# Altium PCB Galileo_Control_Board.PcbDoc
Units mil, origin at the board's own origin, x right, y up, seen from the top; angles counter-clockwise.
Board outline 1834.65 x 1606.3 mil, 2 copper layers (Top Layer, Bottom Layer); 53 components, 57 nets, 204 pads, 33 vias.
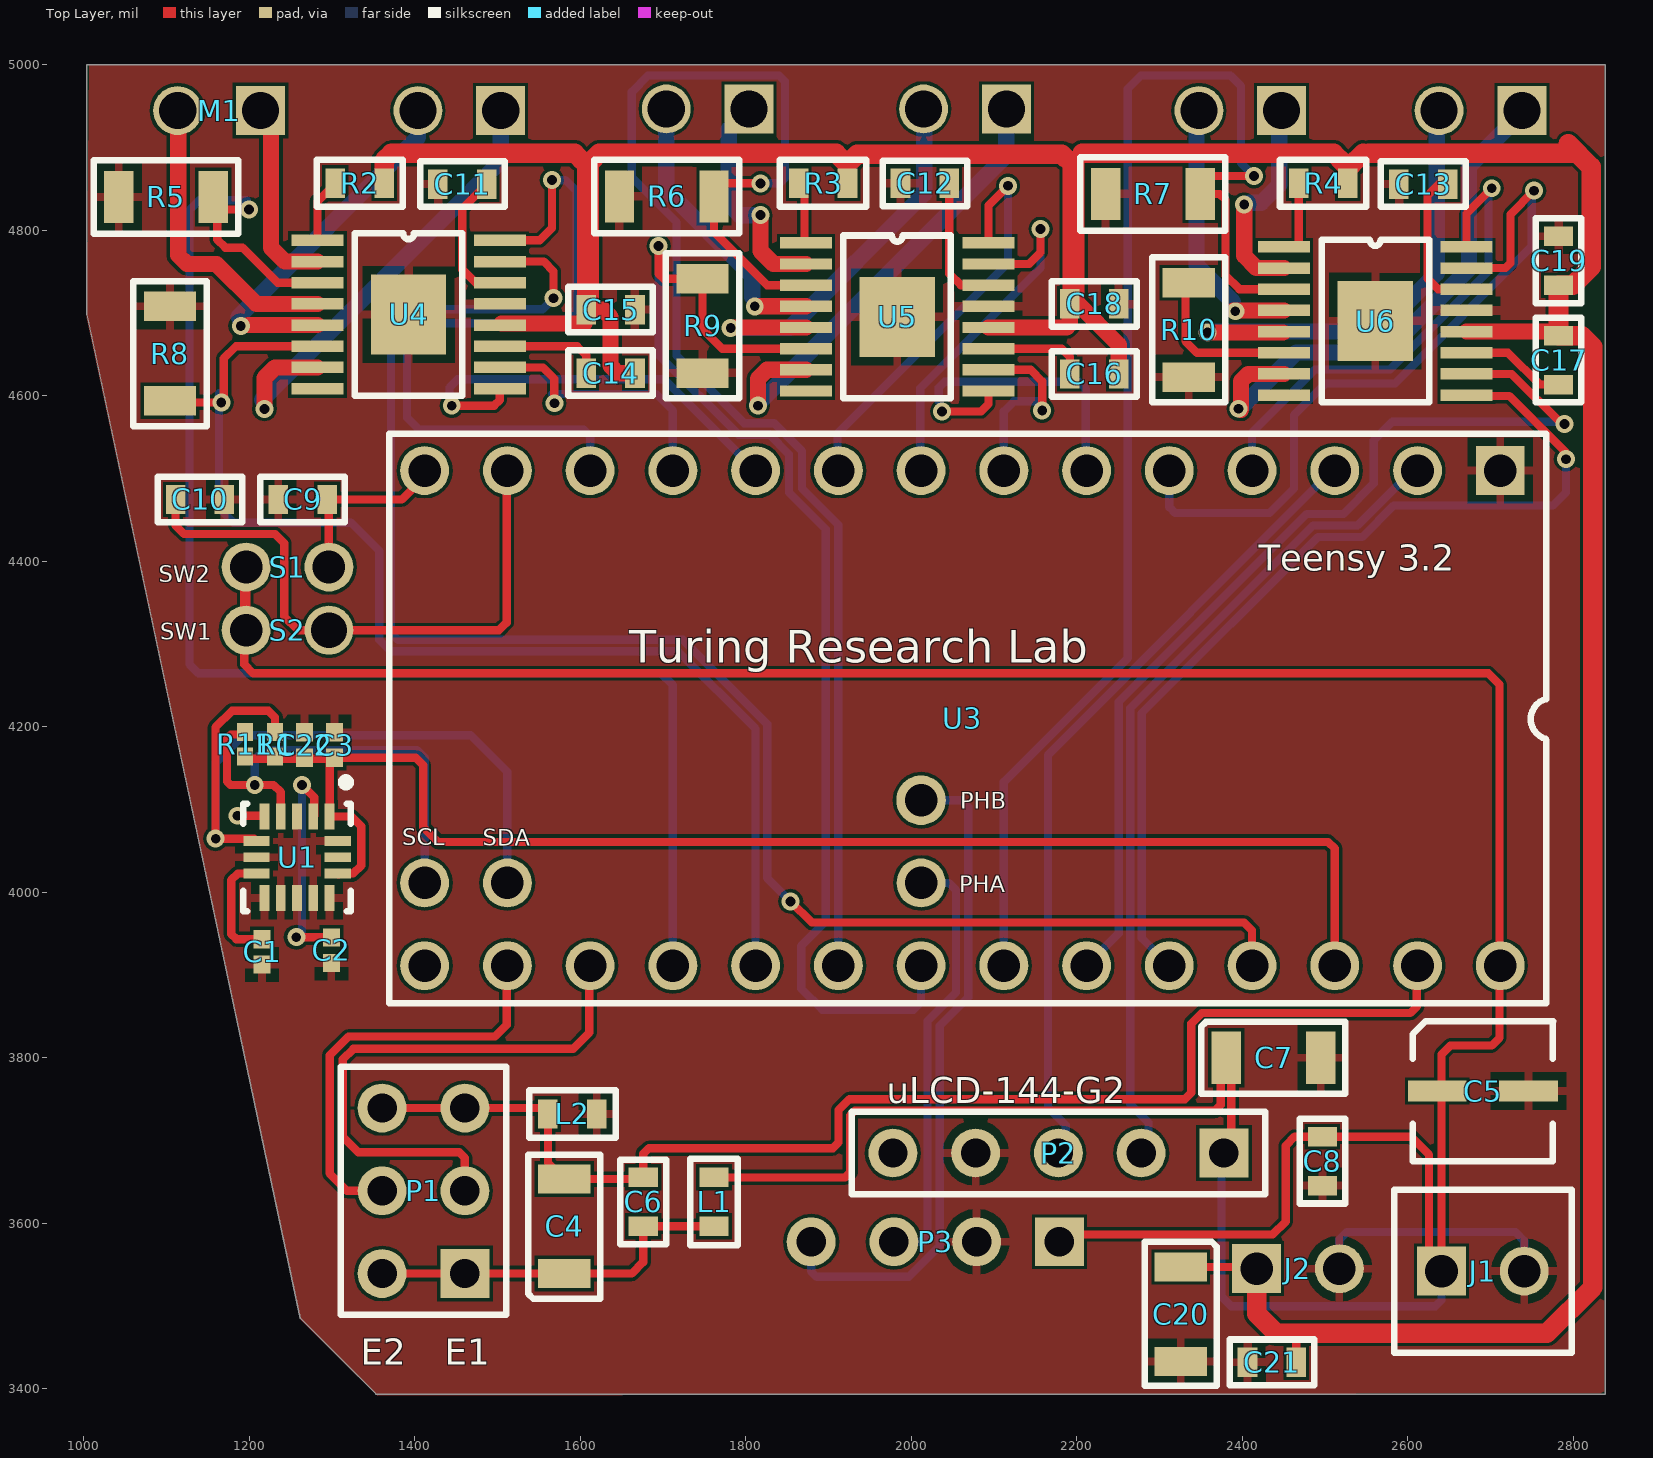
[diagram p0: Top Layer view]
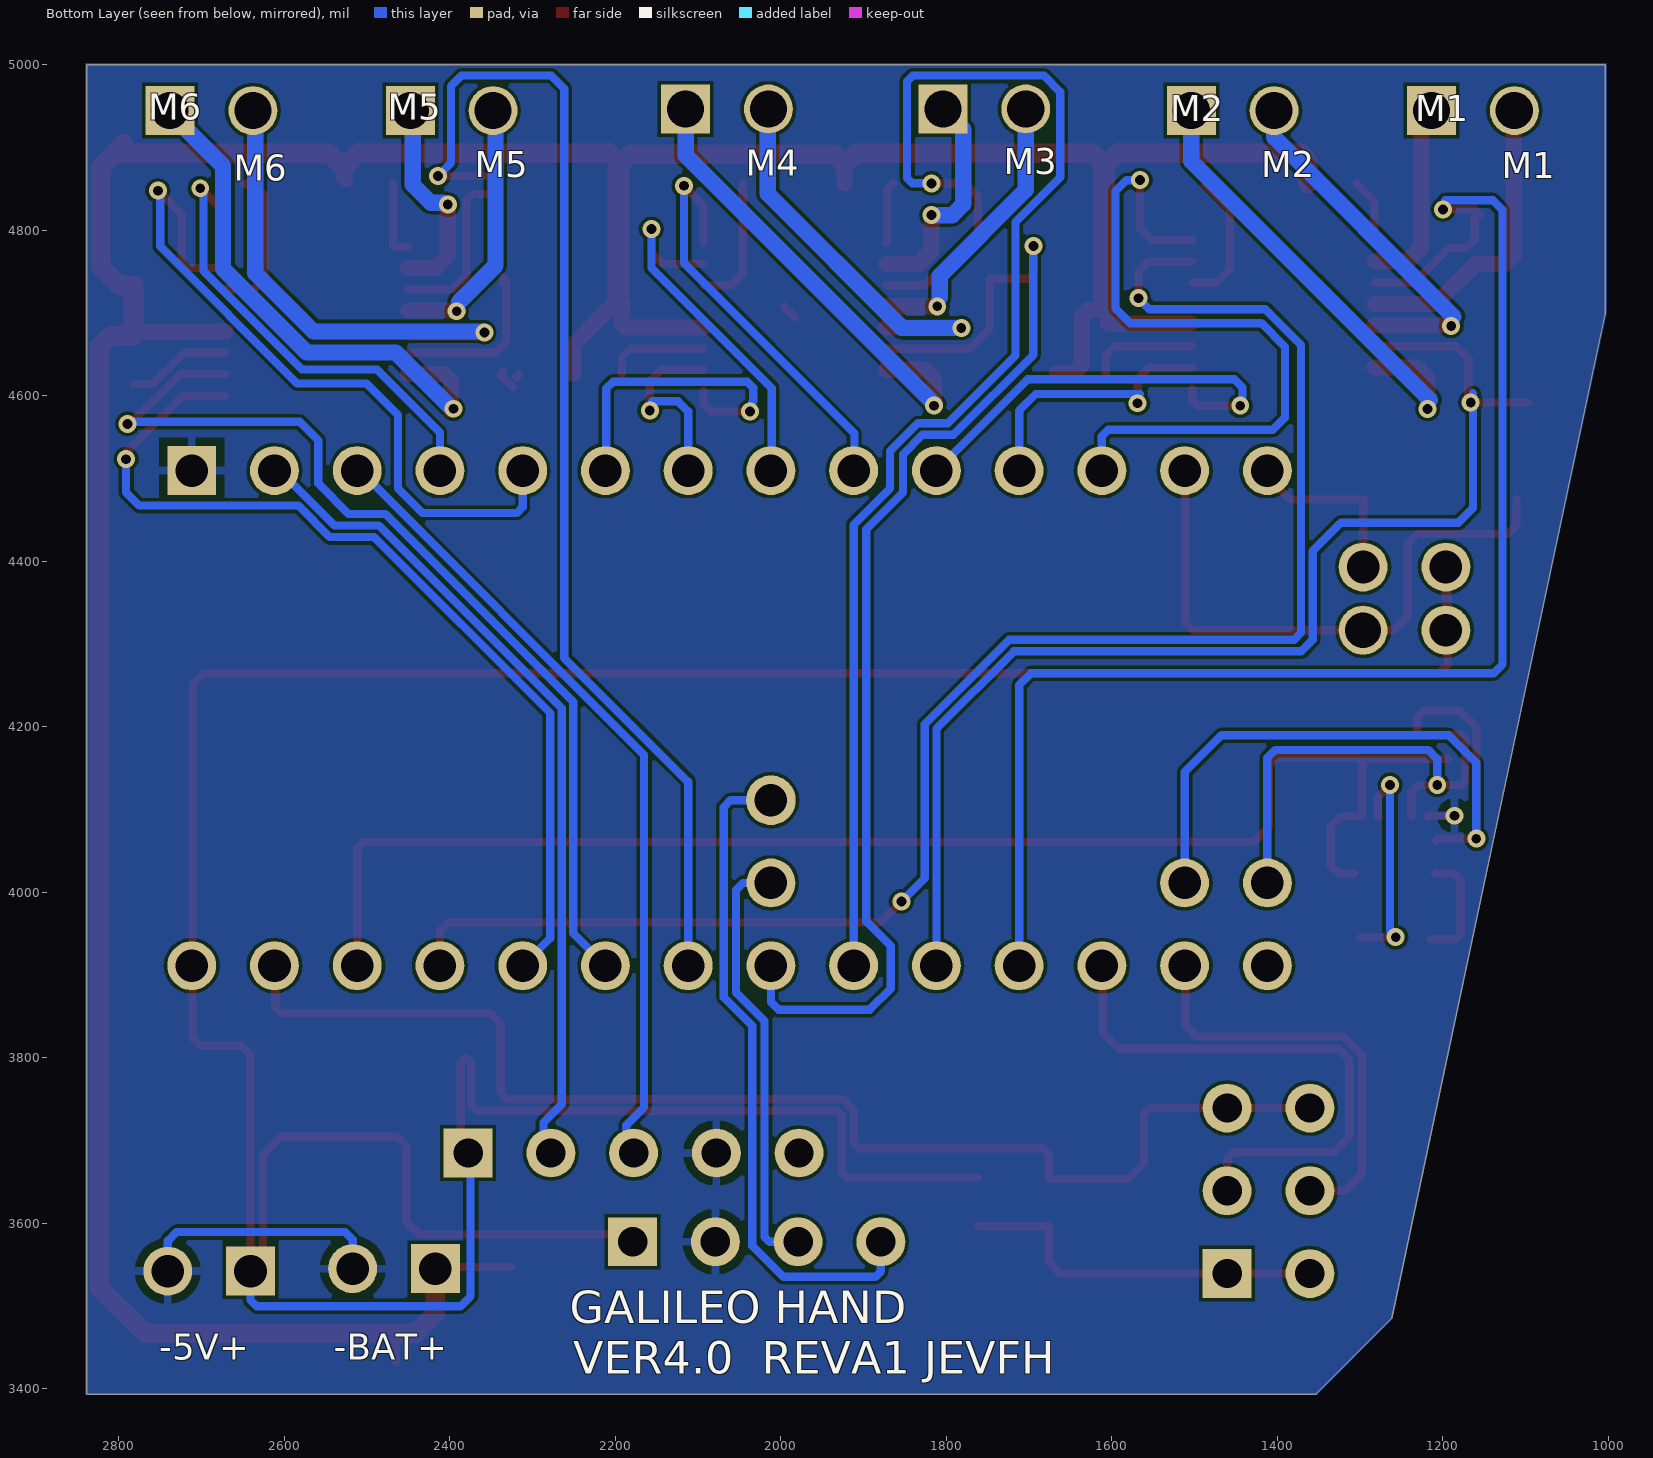
[diagram p1: Bottom Layer view, seen from below]

## Layer stack, top to bottom
Top Solder: solder mask 0.4, Solder Resist, Dk 3.5
Top Layer: signal copper 1.4
Dielectric 1: dielectric 12.6, FR-4, Dk 4.8
Bottom Layer: signal copper 1.4
Bottom Solder: solder mask 0.4, Solder Resist, Dk 3.5

## Board outline
1261.81,3485.04 1003.94,4698.43 1003.94,5000 2838.58,5000 2838.58,3393.7 1353.15,3393.7

## Design rules (kind name [scope] priority, off if disabled: settings)
Clearance [All] p1: gap=3.94 ignorepadtopadclearanceinfootprint=FALSE except(0: Arc-Hole Track-Hole SMDPad-Hole THPad-Hole Via-Hole Fill-Hole Poly-Hole Region-Hole Text-Hole)
ComponentClearance [All] p1: gap=7.87 collisioncheckmode=3 verticalgap=10 showdistances=FALSE
HoleSize [All] p1: absolutevalues=TRUE maxlimit=100 minlimit=0.79 maxpercent=80.000 minpercent=20.000
HoleToHoleClearance [All] p1: gap=3.94 allowstackedmicrovias=TRUE
MinimumSolderMaskSliver [All] p1: minsoldermaskwidth=3.94
MinimumSolderMaskSliver MinimumSolderMaskSliver_2 [All] p2: minsoldermaskwidth=3.94
MinimumSolderMaskSliver MinimumSolderMaskSliver_1 [All] p3: minsoldermaskwidth=1.97
PolygonConnect [All] p1: connectstyle=Relief reliefconductorwidth=10 reliefentries=4 polygonreliefangle="90 Angle" airgapwidth=10
RoutingVias [All] p1: holewidth=28 width=50 viastyle="Through Hole" minholewidth=28 minwidth=50 maxholewidth=28 maxwidth=50
SilkToSilkClearance [All] p1: silktosilkclearance=3.94
SilkToSolderMaskClearance [IsPad] p1: minsilkscreentomaskgap=3.94 clearancetoexposedcopper=TRUE
SolderMaskExpansion [All] p1: expansion=3.94
Width [All] p1: maxlimit=27.56 minlimit=10 preferedwidth=10
24 further rules are at their usual default settings.

## Components (designator, comment, footprint, x,y, rotation, side; value= is the part's Value field where it differs from the comment)
C1 "GRM155R71C104KA88J" CAPC1005X55X25LL05T10 1215.55,3928.15 r90 top
C2 "GRM155R71C104KA88J" CAPC1005X55X25LL05T10 1299.21,3930.12 r270 top
C3 "GRM155R60J475ME47D" CAPC1005X55X25LL05T10 1303.07,4178.15 r270 top
C4 "10uF, T" C1206 1580.71,3596.46 r90 top
C5 "10uF" CSVB 2690.94,3759.84 r0 top
C6 "100nF" C0603 1676.18,3625.98 r270 top
C7 "10uF, T" C1206 2437.99,3800.2 r0 top
C8 "100nF" C0603 2497.05,3675.2 r90 top
C9 "1uF" C0603 1264.57,4474.94 r0 top
C10 "1uF" C0603 1140.47,4474.94 r180 top
C11 "2.2uF" C0603 1457.6,4855.94 r180 top
C12 "2.2uF" C0603 2016.65,4856.93 r180 top
C13 "2.2uF" C0603 2619.02,4855.94 r180 top
C14 "10nF" C0603 1636.73,4627.6 r0 top
C15 "10uF" C0603 1636.73,4704.37 r180 top
C16 "10nF" C0603 2221.38,4626.61 r0 top
C17 "10nF" C0603 2782.4,4643.35 r90 top
C18 "10uF" C0603 2221.38,4711.26 r180 top
C19 "10uF" C0603 2782.4,4763.43 r270 top
C20 "10uF, T" C1206 2325.79,3490.16 r270 top
C21 "100nF" C0603 2436.02,3432.09 r0 top
C22 "GRM155R71C104KA88J" CAPC1005X55X25LL05T10 1266.65,4178.15 r270 top
J1 "TERMINAL BLOCK  2POS 3.5MM" 2POS3.5MM 2690.94,3542.32 r0 top
J2 "TERMINAL BLOCK  2POS 3.5MM" 2POS3.5MM 2467.52,3545.28 r0 top
L1 "EMI FILTER BED" R0603 1761.81,3625.98 r270 top
L2 "EMI FILTER BED" R0603 1590.55,3732.28 r180 top
M1 "Motor Pads" HDR1X2 1213.5,4944.88 r180 top
M2 "Motor Pads" HDR1X2 1503.86,4944.88 r180 bottom
M3 "Motor Pads" HDR1X2 1804.06,4946.85 r180 bottom
M4 "Motor Pads" HDR1X2 2115.08,4946.85 r180 bottom
M5 "Motor Pads" HDR1X2 2447.76,4944.88 r180 bottom
M6 "Motor Pads" HDR1X2 2738.11,4944.88 r180 bottom
P1 "Header 3X2" HDR2X3 1460.63,3539.37 r90 top
P2 "Header 5" HDR1X5 2377.95,3685.04 r180 top
P3 "Encoder" HDR1X4 2179.13,3577.76 r180 top
R1 "ERA-2AED472X" RESC1005X40X25LL10T10 1231.22,4179.13 r270 top
R2 "47k" R0603 1333.58,4856.93 r0 top
R3 "47k" R0603 1893.56,4856.93 r0 top
R4 "47k" R0603 2497.95,4856.93 r0 top
R5 "0.2" R1206 1099.41,4840.55 r0 top
R6 "0.2" R1206 1704.64,4841.18 r0 top
R7 "0.2" R1206 2292.24,4844.13 r0 top
R8 "0.2" R1206 1104.25,4651.22 r270 top
R9 "0.2" R1206 1747.95,4684.69 r90 top
R10 "0.2" R1206 2335.55,4679.76 r90 top
R11 "ERA-2AED472X" RESC1005X40X25LL10T10 1194.8,4179.13 r270 top
S1 "PB" SW#1 1246.26,4393.25 r180 top
S2 "PB" SW#2 1246.26,4316.93 r180 top
U1 "FXOS8700CQR1" FREE-QFN-16-3000X3000DE_V 1257.8,4042.48 r270 top
U3 "Teensy 3.2 - NXP Cortex-M4F" DIP28 2062.01,4210.63 r270 top
U4 "DRV8833CPWPR" SOP16 1392.64,4698.46 r0 top
U5 "DRV8833CPWPR" SOP16 1983.19,4695.51 r0 top
U6 "DRV8833CPWPR" SOP16 2560.95,4690.59 r0 top

## Footprints (in the part's own frame and the unit in brackets; to place one, negate y for a bottom-side part, rotate by r counter-clockwise, add the part's x,y. Pads: shape width x height; smd on the part's side, far side on the other; paste and mask are expansions set on the pad)
2POS3.5MM [mm]
  rect 1.5x1.5 hole 1: 1(-1.27,0)
  round 1.5 hole 1: 2(1.27,0)
  silkscreen extent -2.72,-2.5 2.72,2.5
C0603 [mm]
  rect 0.6x0.9 smd: 1(-0.75,0) 2(0.75,0)
  silkscreen extent -1.3,-0.7 1.3,0.7
C1206 [mm]
  rect 0.9x1.6 smd: 1(-1.45,0) 2(1.45,0)
  silkscreen extent -2.22,-1.1 2.2,1.1
CAPC1005X55X25LL05T10 [mm] "Chip Capacitor, 2-Leads, Body 1.00x0.50mm, IPC High Density"
  rect 0.56x0.52 smd: 1(-0.39,0) 2(0.39,0)
  body extent -0.53,-0.28 0.53,0.28, height 0.55
CSVB [mm]
  rect 1.8x0.65 smd: 1(-1.4,0) 2(1.4,0)
  silkscreen extent -2.15,-2.15 2.16,2.15
DIP28 [mm]
  rect 1.5x1.5 hole 1 mask+0.1: 1(-7.6,16.51)
  round 1.5 hole 1 mask+0.1: 2(-7.6,13.97) 3(-7.6,11.43) 4(-7.6,8.89) 5(-7.6,6.35) 6(-7.6,3.81) 7(-7.6,1.27) 8(-7.6,-1.27) 9(-7.6,-3.81) 10(-7.6,-6.35) 11(-7.6,-8.89) 12(-7.6,-11.43) 13(-7.6,-13.97) 14(-7.6,-16.51) 15(7.6,-16.51) 16(7.6,-13.97) 17(7.6,-11.43) 18(7.6,-8.89) 19(7.6,-6.35) 20(7.6,-3.81) 21(7.6,-1.27) 22(7.6,1.27) 23(7.6,3.81) 24(7.6,6.35) 25(7.6,8.89) 26(7.6,11.43) 27(7.6,13.97) 28(7.6,16.51)
  silkscreen extent -8.72,-17.6 8.75,17.93
FREE-QFN-16-3000X3000DE_V [mm] "QFN, 16-Leads, Body 3.00x3.00mm, Pitch 0.50mm"
  rect 0.8x0.3 smd: 1(-1.25,1) 2(-1.25,0.5) 3(-1.25,0) 4(-1.25,-0.5) 5(-1.25,-1) 9(1.25,-1) 10(1.25,-0.5) 11(1.25,0) 12(1.25,0.5) 13(1.25,1)
  rect 0.3x0.8 smd: 6(-0.5,-1.25) 7(0,-1.25) 8(0.5,-1.25) 14(0.5,1.25) 15(0,1.25) 16(-0.5,1.25)
  silkscreen extent -2.42,-1.65 1.65,1.65, body extent -1.5,-1.5 1.5,1.5, height 1.25
HDR1X2 [mm] "Connector; Header; 2 Position"
  rect 1.5x1.5 hole 1.143: 1(0,0)
  round 1.5 hole 1.143: 2(2.54,0)
HDR1X4 [mm] "Connector; Header; 4 Position"
  rect 1.5x1.5 hole 0.9: 1(0,0)
  round 1.5 hole 0.9: 2(2.54,0) 3(5.08,0) 4(7.62,0)
HDR1X5 [mm] "Connector; Header; 5 Position"
  rect 1.5x1.5 hole 0.9: 1(0,0)
  round 1.5 hole 0.9: 2(2.54,0) 3(5.08,0) 4(7.62,0) 5(10.16,0)
  silkscreen extent -1.27,-1.27 11.43,1.27
HDR2X3 [mm] "Connector; Header; 3x2 Position"
  rect 1.5x1.5 hole 0.9: 1(0,0)
  round 1.5 hole 0.9: 2(0,2.54) 3(2.54,0) 4(2.54,2.54) 5(5.08,0) 6(5.08,2.54)
  silkscreen extent -1.27,-1.27 6.35,3.81
R0603 [mm]
  rect 0.6x0.9 smd: 1(-0.75,0) 2(0.75,0)
  silkscreen extent -1.33,-0.72 1.33,0.72
R1206 [mm]
  rect 0.9x1.6 smd: 1(-1.45,0) 2(1.45,0)
  silkscreen extent -2.22,-1.12 2.22,1.12, body extent -1.6,-0.8 1.6,0.8, height 0.64
RESC1005X40X25LL10T10 [mm] "Chip Resistor, 2-Leads, Body 1.00x0.50mm, IPC High Density"
  rect 0.55x0.5 smd: 1(-0.375,0) 2(0.375,0)
  body extent -0.55,-0.3 0.55,0.3, height 0.4
SOP16 [mm]
  rect 1.6x0.35 smd mask+0.075: 1(-2.8,2.275) 2(-2.8,1.625) 3(-2.8,0.975) 4(-2.8,0.325) 5(-2.8,-0.325) 6(-2.8,-0.975) 7(-2.8,-1.625) 8(-2.8,-2.275) 9(2.8,-2.275) 10(2.8,-1.625) 11(2.8,-0.975) 12(2.8,-0.325) 13(2.8,0.325) 14(2.8,0.975) 15(2.8,1.625) 16(2.8,2.275)
  rect 2.31x2.46 smd: 17(0,0)
  silkscreen extent -1.65,-2.5 1.65,2.5
SW#1 [mm]
  round 1.5 hole 1: 1(-1.27,0) 2(1.27,0)
SW#2 [mm]
  round 1.5 hole 1.1: 1(-1.27,0)
  round 1.5 hole 1: 2(1.27,0)

## Part data
C1 C2 C22: library part CMP-2008-03928-1, Manufacturer=Murata, Part Number=GRM155R71C104KA88J
C3: library part CMP-2008-04549-1, Manufacturer=Murata, Part Number=GRM155R60J475ME47D
C4 C7 C20: library part T491C106K020AT, "CAP TANT 10UF 20V 10% 2413", Capacitance=10µF, ESR (Equivalent Series Resistance)="1.8 Ohm", Lifetime @ Temp.="2000 Hrs @ 85°C", Manufacturer=Kemet, Manufacturer Part Number=TCJA106M025R0150, Manufacturer Size Code=C, Operating Temperature="-55°C ~ 125°C", Package / Case="2413 (6032 Metric)", Tolerance=±10%, Voltage - Rated=20V, Category=Capacitors, ComponentLink1Description=http://www.kemet.com/Lists/ProductCatalog/Attachments/254/KEM_T2005_T491.pdf, ComponentLink1URL=http://www.kemet.com/Lists/ProductCatalog/Attachments/254/KEM_T2005_T491.pdf, Features="General Purpose", Height - Seated (Max)="0.110\" (2.80mm)", Lead Spacing=-, Mounting Type="Surface Mount", Packaging="Cut Tape (CT)", Pricing 1="1=0.73, 10=0.7, 50=0.418, 100=0.3396, 250=0.28216, 500=0.25602, 1000=0.23513 (USD)", Pricing 2="1=0.66, 10=0.487, 100=0.3342, 500=0.2645, 1000=0.2228 (USD)", RoHS="RoHS Compliant", Size / Dimension="0.236\" L x 0.126\" W (6.00mm x 3.20mm)", Stock 1=94667, Stock 2=1927, Supplier 1=Digi-Key, Supplier 2=Digi-Key, Supplier Part Number 2=478-10001-6-ND, TYPE=Molded
C5: library part EEE-1EA100WR, "CAP ALUM 10UF 20% 25V SMD", Capacitance=10µF, ESR (Equivalent Series Resistance)=-, Lifetime @ Temp.="1000 Hrs @ 85°C", Manufacturer="Panasonic Electronic Components", Operating Temperature="-40°C ~ 85°C", Package / Case="Radial, Can - SMD", Ripple Current=22mA, Supplier Part Number 1=PCE3895CT-ND, Tolerance=±20%, Voltage Rating=25V, Applications=Automotive, Category=Capacitors, ComponentLink1Description=http://media.digikey.com/pdf/Data%20Sheets/Panasonic%20Capacitors%20PDFs/EEE_S_A.pdf, ComponentLink1URL=http://media.digikey.com/pdf/Data%20Sheets/Panasonic%20Capacitors%20PDFs/EEE_S_A.pdf, Height - Seated (Max)="0.213\" (5.40mm)", Impedance=-, Lead Spacing=-, Manufacturer Part Number=EEE-1EA100WR, Mounting Type="Surface Mount", Packaging="Cut Tape (CT)", Pricing 1="1=0.41, 10=0.319, 25=0.2612, 50=0.2102, 100=0.1668, 250=0.12324, 500=0.0957, 1000=0.0754 (USD)", RoHS="RoHS Compliant", Size / Dimension="0.157\" Dia (4.00mm)", Stock 1=144383, Supplier 1=Digi-Key, Surface Mount Land Size="0.169\" L x 0.169\" W (4.30mm x 4.30mm)", TYPE=IC
C6 C8 C21: library part GRM188R71E104KA01D, "CAP CER 0.1UF 25V X7R 0603", Capacitance=0.1µF, Manufacturer="Murata Electronics North America", Operating Temperature="-55°C ~ 125°C", Package / Case="0603 (1608 Metric)", Ratings=-, Supplier Part Number 1=490-1524-1-ND, Temperature Coefficient=X7R, Tolerance=±10%, Voltage - Rated=25V, Applications="General Purpose", Category=Capacitors, ComponentLink1Description=http://www.murata.com/~/media/webrenewal/support/library/catalog/products/capacitor/mlcc/c02e.pdf, ComponentLink1URL=http://www.murata.com/~/media/webrenewal/support/library/catalog/products/capacitor/mlcc/c02e.pdf, Features=-, Height - Seated (Max)=-, Lead Spacing=-, Lead Style=-, Manufacturer Part Number=GRM188R71E104KA01D, Mounting Type="Surface Mount, MLCC", Packaging="Cut Tape (CT)", Pricing 1="1=0.1, 10=0.019, 50=0.0104, 100=0.0088, 250=0.0072, 500=0.00616, 1000=0.0048 (USD)", RoHS="RoHS Compliant", Size / Dimension="0.063\" L x 0.031\" W (1.60mm x 0.80mm)", Stock 1=5973420, Supplier 1=Digi-Key, Thickness (Max)="0.035\" (0.90mm)"
C9 C10: library part GRM188R61E105KA12D, "CAP CER 1UF 25V X5R 0603", Capacitance=1µF, Manufacturer="Murata Electronics North America", Operating Temperature="-55°C ~ 85°C", Package / Case="0603 (1608 Metric)", Ratings=-, Supplier Part Number 1=490-3897-1-ND, Temperature Coefficient=X5R, Tolerance=±10%, Voltage - Rated=25V, Applications="General Purpose", Category=Capacitors, ComponentLink1Description=http://www.murata.com/~/media/webrenewal/support/library/catalog/products/capacitor/mlcc/c02e.pdf, ComponentLink1URL=http://www.murata.com/~/media/webrenewal/support/library/catalog/products/capacitor/mlcc/c02e.pdf, Features=-, Height - Seated (Max)=-, Lead Spacing=-, Lead Style=-, Manufacturer Part Number=GRM188R61E105KA12D, Mounting Type="Surface Mount, MLCC", Packaging="Cut Tape (CT)", Pricing 1="1=0.1, 10=0.044, 50=0.0238, 100=0.0202, 250=0.01652, 500=0.01412, 1000=0.01101 (USD)", RoHS="RoHS Compliant", Size / Dimension="0.063\" L x 0.031\" W (1.60mm x 0.80mm)", Stock 1=1934941, Supplier 1=Digi-Key, Thickness (Max)="0.035\" (0.90mm)"
C11 C12 C13: library part 06036D225KAT2A, "CAP CER 2.2UF 6.3V X5R 0603", Capacitance=2.2µF, Manufacturer="AVX Corporation", Operating Temperature="-55°C ~ 85°C", Package / Case="0603 (1608 Metric)", Ratings=-, Supplier Part Number 1=478-1252-1-ND, Temperature Coefficient=X5R, Tolerance=±10%, Voltage - Rated=6.3V, Applications="General Purpose", Category=Capacitors, ComponentLink1Description=http://datasheets.avx.com/cx5r.pdf, ComponentLink1URL=http://datasheets.avx.com/cx5r.pdf, Features=-, Height - Seated (Max)=-, Lead Spacing=-, Lead Style=-, Manufacturer Part Number=06036D225KAT2A, Mounting Type="Surface Mount, MLCC", Packaging="Cut Tape (CT)", Pricing 1="1=0.27, 10=0.224, 100=0.112, 250=0.084, 500=0.0742, 1000=0.0658 (USD)", RoHS="RoHS Compliant", Size / Dimension="0.063\" L x 0.032\" W (1.60mm x 0.81mm)", Stock 1=9901, Supplier 1=Digi-Key, Thickness (Max)="0.035\" (0.90mm)"
C14 C16 C17: library part C0603C103K4RACTU, "CAP CER 10000PF 16V X7R 0603", Capacitance=10000pF, Manufacturer=Kemet, Operating Temperature="-55°C ~ 125°C", Package / Case="0603 (1608 Metric)", Ratings=-, Supplier Part Number 1=399-7841-1-ND, Temperature Coefficient=X7R, Tolerance=±10%, Voltage - Rated=16V, Applications="General Purpose", Category=Capacitors, ComponentLink1Description=http://www.kemet.com/docfinder?Partnumber=C0603C103K4RACTU, ComponentLink1URL=http://www.kemet.com/docfinder?Partnumber=C0603C103K4RACTU, Features=-, Height - Seated (Max)=-, Lead Spacing=-, Lead Style=-, Manufacturer Part Number=C0603C103K4RACTU, Mounting Type="Surface Mount, MLCC", Packaging="Cut Tape (CT)", Pricing 1="1=0.25, 10=0.173, 50=0.105, 100=0.0882, 250=0.0714, 500=0.063, 1000=0.05355 (USD)", RoHS="RoHS Compliant", Size / Dimension="0.063\" L x 0.031\" W (1.60mm x 0.80mm)", Stock 1=179935, Supplier 1=Digi-Key, Thickness (Max)="0.034\" (0.87mm)"
C15 C18 C19: library part GRT188R61E106ME13D, "CAP CER 10UF 25V X5R 0603", Capacitance=10µF, Manufacturer="Murata Electronics North America", Operating Temperature="-55°C ~ 85°C", Package / Case="0603 (1608 Metric)", Ratings=AEC-Q200, Supplier Part Number 1=490-12323-1-ND, Temperature Coefficient=X5R, Tolerance=±20%, Voltage - Rated=25V, Applications=Automotive, Category=Capacitors, ComponentLink1Description=http://search.murata.co.jp/Ceramy/image/img/A01X/G101/ENG/GRT188R61E106ME13-01.pdf, ComponentLink1URL=http://search.murata.co.jp/Ceramy/image/img/A01X/G101/ENG/GRT188R61E106ME13-01.pdf, Features=-, Height - Seated (Max)=-, Lead Spacing=-, Lead Style=-, Manufacturer Part Number=GRT188R61E106ME13D, Mounting Type="Surface Mount, MLCC", Packaging="Cut Tape (CT)", Pricing 1="1=0.48, 10=0.424, 50=0.2576, 100=0.2121, 250=0.16968, 500=0.15454, 1000=0.13938 (USD)", RoHS="RoHS Compliant", Size / Dimension="0.063\" L x 0.031\" W (1.60mm x 0.80mm)", Stock 1=62, Supplier 1=Digi-Key, Thickness (Max)="0.035\" (0.90mm)"
J1 J2: library part 0393570002, "CONN TERMINAL BLOCK 2POS 3.5MM", Color=Black, Current=12A, Manufacturer="Molex, LLC", Operating Temperature="-40°C ~ 105°C", Supplier Part Number 1=WM7877-ND, Voltage=300V, Category="Connectors, Interconnects", Clamp Material - Plating="Copper Alloy - Nickel Plated", ComponentLink1Description=http://www.molex.com/pdm_docs/sd/393570002_sd.pdf, ComponentLink1URL=http://www.molex.com/pdm_docs/sd/393570002_sd.pdf, Contact Material - Plating="Copper Alloy - Tin Plated", Features=-, Housing Material="Polyamide (PA), Nylon", Manufacturer Part Number=0393570002, Mating Orientation="Horizontal with Board", Mounting Type="Through Hole", Number of Levels=1, Packaging=Bulk, Pitch="0.138\" (3.50mm)", Positions Per Level=2, Pricing 1="1=1.1, 10=0.686, 50=0.528, 100=0.517, 250=0.44, 500=0.418, 1000=0.374, 2500=0.297, 5000=0.2926 (USD)", RoHS="RoHS Compliant", Screw Material - Plating="Copper Alloy - Nickel Plated", Screw Thread=M3, Stock 1=1266, Supplier 1=Digi-Key, Torque - Screw="0.31 Nm (2.7 Lb-In)", Wire Gauge="16-28 AWG", Wire Termination="Screw - Rising Cage Clamp"
L1 L2: library part BLM18PG471SN1D, "FERRITE BEAD 470 OHM 0603", Current Rating (Max)=1A, DC Resistance (DCR) (Max)="200 mOhm", Impedance @ Frequency="470 Ohm @ 100MHz", Manufacturer="Murata Electronics North America", Operating Temperature="-55°C ~ 125°C", Package / Case="0603 (1608 Metric)", Ratings=-, Supplier Part Number 1=490-5223-1-ND, Category=Filters, ComponentLink1Description=http://search.murata.co.jp/Ceramy/image/img/PDF/ENG/L0110S0100BLM18P.pdf, ComponentLink1URL=http://search.murata.co.jp/Ceramy/image/img/PDF/ENG/L0110S0100BLM18P.pdf, Filter Type="Power Line", Height (Max)="0.037\" (0.95mm)", Manufacturer Part Number=BLM18PG471SN1D, Mounting Type="Surface Mount", Number of Lines=1, Packaging="Cut Tape (CT)", Pricing 1="1=0.1, 10=0.083, 50=0.0684, 100=0.0501, 250=0.03644, 500=0.0334, 1000=0.02884 (USD)", RoHS="RoHS Compliant", Size / Dimension="0.063\" L x 0.031\" W (1.60mm x 0.80mm)", Stock 1=101023, Supplier 1=Digi-Key
M1 M2 M3 M4 M5 M6: library part "Header 2", "Header, 2-Pin", LatestRevisionDate=17-Jul-2002, LatestRevisionNote="Re-released for DXP Platform.", Publisher="Altium Limited"
P1: "Header, 3-Pin, Dual row", LatestRevisionDate=17-Jul-2002, LatestRevisionNote="Re-released for DXP Platform.", Publisher="Altium Limited"
P2: "Header, 5-Pin", LatestRevisionDate=17-Jul-2002, LatestRevisionNote="Re-released for DXP Platform.", Publisher="Altium Limited"
P3: library part "Header 4", "Header, 4-Pin", LatestRevisionDate=17-Jul-2002, LatestRevisionNote="Re-released for DXP Platform.", Publisher="Altium Limited"
R1 R11: library part CMP-2002-05861-1, Manufacturer=Panasonic, Part Number=ERA-2AED472X
R2 R3 R4: library part ERJ-3EKF4702V, "RES SMD 47K OHM 1% 1/10W 0603", Manufacturer="Panasonic Electronic Components", Operating Temperature="-55°C ~ 155°C", Package / Case="0603 (1608 Metric)", Power (Watts)="0.1W, 1/10W", Supplier Device Package=0603, Supplier Part Number 1=P47.0KHCT-ND, Temperature Coefficient=±100ppm/°C, Tolerance=±1%, Category=Resistors, ComponentLink1Description=http://industrial.panasonic.com/www-cgi/jvcr13pz.cgi?E+PZ+3+AOA0002+ERJ3EKF4702V+7+WW, ComponentLink1URL=http://industrial.panasonic.com/www-cgi/jvcr13pz.cgi?E+PZ+3+AOA0002+ERJ3EKF4702V+7+WW, Composition="Thick Film", Features="Automotive AEC-Q200", Height="0.022\" (0.55mm)", Manufacturer Part Number=ERJ-3EKF4702V, Number of Terminations=2, Packaging="Cut Tape (CT)", Pricing 1="1=0.1, 50=0.0114, 100=0.0084, 250=0.00644, 500=0.00514, 1000=0.00379 (USD)", Resistance (Ohms)=47k, RoHS="RoHS Compliant", Size / Dimension="0.063\" L x 0.031\" W (1.60mm x 0.80mm)", Stock 1=3738786, Supplier 1=Digi-Key
R5 R6 R7 R8 R9 R10: library part ERJ-8BSJR20V, "RES SMD 0.2 OHM 5% 1/2W 1206", Manufacturer="Panasonic Electronic Components", Operating Temperature="-55°C ~ 125°C", Package / Case="1206 (3216 Metric)", Power (Watts)="0.5W, 1/2W", Supplier Device Package=1206, Supplier Part Number 1=P17692CT-ND, Temperature Coefficient=±250ppm/°C, Tolerance=±5%, Category=Resistors, ComponentLink1Description=https://industrial.panasonic.com/cdbs/www-data/pdf/RDA0000/AOA0000C239.pdf, ComponentLink1URL=https://industrial.panasonic.com/cdbs/www-data/pdf/RDA0000/AOA0000C239.pdf, Composition="Thick Film", Features="Automotive AEC-Q200, Current Sense", Height="0.028\" (0.70mm)", Manufacturer Part Number=ERJ-8BSJR20V, Number of Terminations=2, Packaging="Cut Tape (CT)", Pricing 1="1=0.43, 50=0.1858, 100=0.1381, 250=0.11668, 500=0.10002, 1000=0.07621 (USD)", Resistance (Ohms)=0.2, RoHS="RoHS Compliant", Size / Dimension="0.126\" L x 0.063\" W (3.20mm x 1.60mm)", Stock 1=4865, Supplier 1=Digi-Key
S1 S2: library part "D6C90 F1 LFS", "SWITCH PUSH SPST-NO 0.1A 32V", Color - Actuator/Cap=Black, Current Rating="100mA (DC)", Illumination Type, Color=-, Manufacturer="C&K Components", Operating Temperature="-20°C ~ 85°C", Supplier Part Number 1=401-1969-ND, Voltage Rating - DC=32V, Actuator Type="Square, Button", Category=Switches, Circuit=SPST-NO, ComponentLink1Description=http://www.ck-components.com/index.php?module=media&action=Display&cmpref=13327&lang=en&width=&height=&format=&alt=, ComponentLink1URL=http://www.ck-components.com/index.php?module=media&action=Display&cmpref=13327&lang=en&width=&height=&format=&alt=, Electrical Life="250,000 Cycles", Features="Tactile Feedback", Illumination Voltage (Nominal)=-, Ingress Protection=-, Manufacturer Part Number="D6C90 F1 LFS", Mechanical Life=-, Mounting Type="Through Hole", Packaging=Bulk, Panel Cutout Dimensions=-, Pricing 1="1=0.82, 10=0.767, 25=0.73, 50=0.6936, 100=0.6753, 250=0.657, 500=0.6205, 1000=0.584, 2500=0.52925 (USD)", RoHS="RoHS Compliant", Stock 1=9241, Supplier 1=Digi-Key, Switch Function=Off-Mom, Termination Style="PC Pin", TYPE=IC, Voltage Rating - AC=-
U1: library part CMP-2000-05129-1, "6-Axis Xtrinsic Sensor with Integrated Linear Accelerometer and Magnetometer, 1.95 to 3.6 V, -40 to 85 degC, 16-Pin QFN, RoHS, Tape and Reel", Manufacturer=Freescale, Maximum Operating Temperature=+85C, Minimum Operating Temperature=-40C, Operating Supply Voltage=1.95Vto3.6V, Package / Case=QFN-16, Package Description="16-Pin Quad Flat No-lead Package, Body 3 x 3 mm, Pitch 0.5 mm", Supply Voltage - Max=3.6V, Supply Voltage - Min=1.95V, Brand=FreescaleSemiconductor, Datasheet URL=https://datasheet.ciiva.com/12175/fxos8700cq-60595-12175213.pdf, Datasheet Version="Rev. 1, 06/2012", Factory Pack Quantity=1000, Manufacturer URL=http://www.nxp.com/, Mounting Style=SMD/SMT, Output Type=Digital, Package Reference=QFN-16, Packaging=Reel, Product Category=BoardMountAccelerationSensors, RoHS=Details, Sensing Axis=X,Y,Z, Tradename=Xtrinsic, TYPE=6AxisSensor, Unit Weight=0.000808oz
U3: library part Teensy, Manufacturer="SparkFun Electronics", Manufacturer Part Number=DEV-13305, Operating System=-, Supplier Part Number 1=1568-1233-ND, Board Type="Evaluation Platform", Category="Programmers, Development Systems", ComponentLink1Description=http://media.digikey.com/pdf/Data%20Sheets/Sparkfun%20PDFs/DEV-13305_Web.pdf, ComponentLink1URL=http://media.digikey.com/pdf/Data%20Sheets/Sparkfun%20PDFs/DEV-13305_Web.pdf, ComponentLink2Description=http://media.digikey.com/pdf/Data%20Sheets/Sparkfun%20PDFs/DEV-13736_Web.pdf, ComponentLink2URL=http://media.digikey.com/pdf/Data%20Sheets/Sparkfun%20PDFs/DEV-13736_Web.pdf, Contents=Board(s), Core Processor="ARM® Cortex®-M0+", For Use With/Related Products=KL2x, Mounting Type=Fixed, Platform=Teensy-LC, Pricing 1="1=14.38 (USD)", Pricing 2="1=22.5 (USD)", RoHS="RoHS Compliant", Stock 1=0, Stock 2=961, Supplier 1=Digi-Key, Supplier 2=Digi-Key, Supplier Part Number 2=1568-1231-ND, TYPE=IC
U4 U5 U6: "IC MOTOR DRIVER PAR", Current - Output / Channel=700mA, Current - Peak Output=1A, Manufacturer="Texas Instruments", Operating Temperature="-40°C ~ 150°C (TJ)", Package / Case="16-TSSOP (0.173\", 4.40mm Width) Exposed Pad", Supplier Device Package=16-HTSSOP, Supplier Part Number 1=296-40078-1-ND, Voltage - Load="2.7 V ~ 10.8 V", Applications="DC Motors, General Purpose, Solenoids, Stepper Motors", Category="Integrated Circuits (ICs)", ComponentLink1Description=http://www.ti.com/lit/ds/symlink/drv8833c.pdf, ComponentLink1URL=http://www.ti.com/lit/ds/symlink/drv8833c.pdf, Fault Protection="Current Limiting, Over Temperature, Short Circuit, UVLO", Features="Status Flag", Interface=PWM, Load Type=Inductive, Manufacturer Part Number=DRV8833CPWPR, Mounting Type="Surface Mount", Output Configuration="Half Bridge (4)", Packaging="Cut Tape (CT)", Pricing 1="1=2.05, 10=1.843, 100=1.4783, 500=1.215, 1000=0.84375 (USD)", Rds On (Typ)="550 mOhm LS, 1.18 Ohm HS", RoHS="RoHS Compliant", Stock 1=779, Supplier 1=Digi-Key, Technology="Power MOSFET", Voltage - Supply="2.7 V ~ 10.8 V"

## Free pads (board coordinates)
  round 60 hole 39.37: 3(2012.01,4111.42)
  round 59.06 hole 39.37: ""(1412.01,4011.42) ""(1512.01,4011.42) ""(2012.01,4011.42)

## Via types
v1: diameter 21.65, hole 11.81, Top Layer to Bottom Layer, 33 vias

## Nets (pads, with @x,y where several pads share a name; then routed paths per layer and width w, separated by ;. In a path a pad name is that pad's centre, name@x,y a point inside that pad or via, vN(x,y) a via of type N, cw(c..) or ccw(c..) an arc to the next point about the centre after c; other vN are vias at no path point)
3V3: C3.2 C22.2 R1.2 R11.2 U1.1 U1.14 U3.26 | length 1745.7
  Top Layer w10: R11.2@1193.82,4161.42 C3.2@1301.69,4161.42 ; U1.14@1307.99,4021.81 U1.14 1325.71,4022.8 1335.55,4032.64 1335.55,4079.88 1323.74,4091.69 U1.1 1297.17,4156.89 C3.2@1301.69,4161.42 ; U3.26 2512.01,4052.95 2503.94,4061.02 1428.15,4061.02 1410.43,4078.74 1410.43,4153.54 1401.18,4162.8 C3.2 C3.2@1301.69,4161.42
+5V/ANA: C4.1 C6.2 L1.2 P1.1 P1.2 | length 450.2
  Top Layer w10: P1.2 P1.1 C4.1 1662.4,3539.37 1676.18,3553.15 C6.2 L1.2
+5V/DIG: C5.1 C7.1 C8.2 J1.1 L1.1 P2.1 P3.1 S1.2 S2.2 U3.28 | length 4570.7
  Top Layer w10: S1.2@1194.1,4398.62 1194.1,4275.39 1204.72,4264.76 2697.83,4264.76 2711.09,4251.51 U3.28@2711.09,3911.42 ; S2.2 S1.2 ; L1.1 1920.28,3655.51 1926.18,3661.42 1926.18,3730.32 1932.09,3736.22 2367.13,3736.22 2374.02,3743.11 2374.02,3793.31 C7.1 2386.81,3794.29 P2.1@2386.81,3676.18 ; P3.1@2187.01,3591.54 2187.01,3576.77 2196.85,3586.61 2437.01,3586.61 2452.76,3602.36 2452.76,3693.9 2463.58,3704.72 C8.2 2604.33,3704.72 2625.98,3683.07 2625.98,3557.28 J1.1 2640.94,3804.33 2651.57,3814.96 2701.77,3814.96 2711.02,3824.21 U3.28@2711.02,3918.31
  Bottom Layer w10: P2.1@2386.81,3676.18 2375,3664.37 2375,3511.81 2386.81,3500 2633.86,3500 2640.94,3507.09 J1.1
+VBAT: C14.2 C15.2 C16.2 C17.2 C18.2 C19.2 C20.1 C21.2 J2.1 R2.2 R3.2 R4.2 U4.12 U5.12 U6.12 | length 4956.5
  Top Layer w10: U4.12 U4.12@1504.84,4687.64 ; 1601.3,4885.47 1601.3,4691.57 1605.24,4687.64 1607.2,4689.6 C15.2 C15.2@1613.11,4710.28 ; C18.2@2187.91,4715.2 2187.91,4886.46 ; C18.2@2199.72,4719.13 C18.2 C18.2@2201.69,4711.26 ; C20.1 J2.1@2415.55,3547.24 ; 2463.58,3467.27 2465.55,3465.3 C21.2 ; R4.2@2522.56,4856.93 2522.56,4881.53 ; R4.2@2527.48,4862.84 R4.2 2532.4,4861.85 2532.4,4879.57 ; C17.2@2782.4,4666.97 C17.2
  Top Layer w19.68: U4.12@1504.84,4687.64 C15.2@1605.24,4687.64 ; C15.2 1627.87,4704.37 1636.73,4695.51 1636.73,4636.46 1645.59,4627.6 C14.2 ; C15.2@1613.11,4710.28 1613.11,4883.5 ; 1923.09,4879.63 R3.2 1923.09,4880.49 ; U5.12 2187.91,4682.72 2191.85,4686.65 C18.2 ; C18.2@2199.72,4719.13 2199.72,4886.46 2206.61,4893.35 ; C18.2@2201.69,4711.26 2250.9,4662.05 C16.2 ; U6.12 C17.2@2777.48,4677.79
  Top Layer w23.62: R2.2 1363.11,4884.49 1371.97,4893.35 1593.43,4893.35 1601.3,4885.47 ; 1613.11,4883.5 1622.95,4893.35 1909.37,4893.35 1923.09,4879.63 ; 1923.09,4880.49 1934.96,4892.36 2182.01,4892.36 2187.91,4886.46 ; 2206.61,4893.35 2510.75,4893.35 2522.56,4881.53 ; J2.1 2417.52,3490.94 2441.2,3467.27 2463.58,3467.27 2768.45,3467.27 2823.82,3522.64 2823.82,4659.45 2810.39,4672.87 C17.2 ; 2532.4,4879.57 2546.18,4893.35 ; 2553.07,4893.35 2797.17,4893.35 ; C17.2@2782.4,4677.79 C19.2 2799.84,4733.9 2821.85,4755.9 2821.85,4876.97 2794.29,4904.53
AGND: C4.2 C6.1 L2.2 P1.5 P1.6 U3.27 | length 1552
  Top Layer w10: P1.6 P1.5 1553.94,3739.37 L2.2 1561.03,3673.23 C4.2 1674.21,3653.54 C6.1 1676.18,3684.05 1683.07,3690.94 1905.51,3690.94 1912.24,3697.68 1912.24,3737.05 1925.36,3750.16 2330.87,3750.16 2338.58,3757.87 2338.58,3841.54 2351.38,3854.33 2603.35,3854.33 2611.09,3862.07 U3.27@2611.09,3918.31
E1: P1.3 U3.17 | length 690.7
  Top Layer w10: P1.3 1460.63,3679.13 1453.74,3686.02 1331.69,3686.02 1312.99,3704.72 1312.99,3798.23 1325.78,3811.02 1591.54,3811.02 1611.09,3830.57 U3.17@1611.09,3918.31
E2: P1.4 U3.16 | length 522.3
  Top Layer w10: P1.4 1318.31,3639.37 1297.24,3660.43 1297.24,3803.15 1319.88,3825.79 1497.05,3825.79 1511.09,3839.83 U3.16@1511.09,3918.31
GND: C1.1 C2.2 C3.1 C5.2 C7.2 C8.1 C9.1 C10.1 C11.2 C12.2 C13.2 C15.1 C18.1 C19.1 C20.2 C21.1 C22.1 J1.2 J2.2 L2.1 P2.4 P3.2 R5.1 R6.1 R7.1 R8.1 R9.1 R10.1 U1.3 U1.5 U1.7 U1.9 U1.10 U1.11 U1.12 U1.13 U1.16 U3.1 U4.13 U4.17 U5.13 U5.17 U6.13 U6.17 | length 405.4
  Top Layer w10: v1(1185.95,4092.68) 1217.44,4092.68 U1.5 ; U5.17 U5.17@1995.98,4708.31 ; R10.1@2316.85,4625.63 R10.1@2319.8,4622.68 ; R10.1@2323.74,4610.87 R10.1@2338.5,4625.63 ; R10.1@2335.55,4629.57 R10.1@2339.49,4625.63 ; J2.2@2512.21,3538.78 J2.2@2512.21,3545.28 ; U3.1 U3.1@2713.58,4511.42 ; J1.2@2744.09,3539.17 J1.2 J1.2@2746.06,3547.44
  Bottom Layer w10: J2.2 2517.52,3580.51 2526.57,3589.57 2730.32,3589.57 2740.94,3578.94 J1.2
IM1: R5.2 U3.18 U4.3 | length 1783.8
  Top Layer w10: R5.2@1154.45,4818.54 R5.2@1161.34,4825.43 ; v1(1199.72,4825.43) R5.2@1161.34,4825.43 ; U4.3 1234.17,4736.85 1191.85,4779.17 1171.18,4779.17 1161.34,4789.02 R5.2@1161.34,4825.43
  Bottom Layer w10: 1196.85,4836.61 1139.76,4836.61 1127.95,4824.8 1127.95,4275.59 1138.78,4264.76 1697.83,4264.76 1712.01,4250.59 U3.18
IM2: R8.2 U3.19 U4.6 | length 1490.7
  Top Layer w10: R8.2@1096.38,4592.17 v1(1166.26,4592.17) 1169.21,4595.12 1169.21,4645.31 1183.98,4660.08 U4.6
  Bottom Layer w10: 1163.39,4603.35 1163.39,4464.57 1181.1,4446.85 1322.83,4446.85 1357.28,4412.4 1357.28,4305.12 1371.06,4291.34 1718.5,4291.34 1812.01,4197.83 U3.19
IM3: R6.2 U3.20 U5.3 | length 1789.2
  Top Layer w10: v1(1817.83,4856.93) 1777.48,4856.93 R6.2 1761.73,4797.88 1825.71,4733.9 U5.3
  Bottom Layer w10: v1(1817.83,4856.93) 1841.18,4856.93 1847.44,4863.19 1847.44,4980.31 1840.55,4987.2 1682.09,4987.2 1662.4,4967.52 1662.4,4864.17 1716.54,4810.04 1716.54,4648.62 1798.07,4567.09 1834.51,4567.09 1868.11,4533.49 1868.11,4488.19 1912.01,4444.29 U3.20 U3.20@1892.72,3911.42
IM4: R9.2 U3.21 U5.6 | length 1504.5
  Top Layer w10: v1(1694.8,4781.14) 1694.8,4747.68 1700.71,4741.77 R9.2 1747.95,4680.75 1771.57,4657.13 U5.6
  Bottom Layer w10: v1(1694.8,4781.14) 1694.8,4649.68 1791.34,4553.15 1828.74,4553.15 1852.36,4529.53 1852.36,4483.27 1896.65,4438.98 1896.65,3964.57 1867.13,3935.04 1867.13,3883.86 1892.72,3858.27 2002.95,3858.27 2012.01,3867.32 U3.21 U3.21@2011.09,3912.34
IM5: R7.2 U3.22 U6.3 | length 1679.3
  Top Layer w10: v1(2414.29,4865.79) 2346.38,4865.79 2349.33,4862.84 R7.2 2372.95,4844.13 2379.84,4837.24 2379.84,4745.71 2396.57,4728.98 U6.3
  Bottom Layer w10: U3.22 2112.01,4133.66 2261.81,4283.46 2261.81,4971.46 2277.56,4987.2 2385.83,4987.2 2398.62,4974.41 2398.62,4881.46 v1(2414.29,4865.79)
IM6: R10.2 U6.6 | length 211.1
  Top Layer w10: R10.2@2335.55,4736.85 2335.55,4743.74 2331.61,4739.8 2331.61,4665.98 2345.39,4652.2 U6.6
M1+: M1.1 U4.2 | length 208.7
  Top Layer w19.68: M1.1@1226.3,4924.84 1226.3,4779.17 1243.03,4762.44 U4.2
M1-: M1.2 U4.4 | length 345.2
  Top Layer w19.68: M1.2@1114.17,4922.8 1114.17,4770.24 1124.92,4759.49 1160.35,4759.49 1208.58,4711.26 U4.4
M2+: M2.1 U4.7 | length 576.1
  Top Layer w19.68: v1(1218.43,4584.29) 1218.43,4621.69 1231.22,4634.49 U4.7
  Bottom Layer w19.68: 1215.55,4595.47 1503.86,4883.78 M2.1@1503.86,4945.51
M2-: M2.2 U4.5 | length 432.4
  Top Layer w10: v1(1189.88,4684.69) 1190.87,4685.67 v1@1198.74,4685.67
  Top Layer w19.68: v1@1198.74,4685.67 U4.5
  Bottom Layer w19.68: 1187.01,4695.87 1403.86,4912.72 M2.2@1403.86,4945.51
M3+: M3.1 U5.2 | length 274
  Top Layer w19.68: v1(1817.83,4818.54) 1817.83,4775.24 1833.58,4759.49 U5.2
  Bottom Layer w19.68: M3.1 1779.53,4922.32 1779.53,4831.69 1792.68,4818.54 v1(1817.83,4818.54)
M3-: M3.2 U5.4 | length 332.5
  Top Layer w19.68: v1(1810.94,4708.31) U5.4
  Bottom Layer w19.68: M3.2 1704.06,4849.09 1808.07,4745.08 1808.07,4719.49
M4+: M4.1 U5.7 | length 577.3
  Top Layer w19.68: v1(1814.88,4588.23) 1814.88,4620.71 1825.71,4631.54 U5.7
  Bottom Layer w19.68: v1@1813.76,4589.35 2115.08,4890.67 M4.1
M4-: M4.2 U5.5 | length 494.7
  Top Layer w10: v1(1781.91,4682.22) v1@1782.4,4682.72
  Top Layer w19.68: v1@1782.4,4682.72 U5.5
  Bottom Layer w19.68: v1(1781.91,4682.22) 1853.48,4682.22 2015.75,4844.49 M4.2@2015.75,4946.85
M5+: M5.1 U6.2 | length 261.1
  Top Layer w19.68: v1(2402.48,4831.34) 2402.48,4769.33 2417.24,4754.57 U6.2
  Bottom Layer w19.68: v1@2408.46,4833.66 2423.23,4833.66 2444.88,4855.31 M5.1@2444.88,4954.72
M5-: M5.2 U6.4 | length 322.9
  Top Layer w10: v1@2389.69,4703.39 2390.67,4702.4 v1(2391.78,4702.4)
  Top Layer w19.68: v1@2389.69,4703.39 U6.4
  Bottom Layer w19.68: M5.2@2344.88,4954.72 2344.88,4757.6 2388.9,4713.58
M6+: M6.1 U6.7 | length 662
  Top Layer w19.68: v1(2395.71,4584.52) 2397.33,4584.52 2398.54,4583.31 2398.54,4617.76 2407.4,4626.61 U6.7
  Bottom Layer w10: M6.1@2735.24,4938.98 M6.1@2735.24,4954.72
  Bottom Layer w19.68: v1@2400.76,4587.77 2465.55,4652.56 2572.83,4652.56 2674.21,4753.94 2674.21,4877.95 M6.1@2735.24,4938.98
M6-: M6.2 U6.5 | length 605.5
  Top Layer w10: U6.5@2449.72,4676.81 U6.5
  Top Layer w19.68: v1(2358.19,4676.81) U6.5@2449.72,4676.81
  Bottom Layer w19.68: v1@2358.19,4677.8 2564.61,4677.8 2635.24,4748.43 M6.2@2635.24,4954.72
M6A: P3.3 pad.@2012.01,4011.42 | length 522.2
  Bottom Layer w10: P3.3 2013.78,3577.76 2019.68,3583.66 2019.68,3844.49 2054.13,3878.94 2054.13,4002.95 2045.67,4011.42 pad.@2012.01,4011.42
M6B: P3.4 pad.3 | length 814.2
  Bottom Layer w10: P3.4 1879.13,3542.13 1885.83,3535.43 1997.05,3535.43 2034.45,3572.83 2034.45,3838.58 2068.9,3873.03 2068.9,4103.35 2060.83,4111.42 pad.3
NetC1_2: C1.2 U1.8 | length 138.7
  Top Layer w10: U1.8 1186.18,4022.8 1178.15,4014.76 1178.15,3949.8 1184.45,3943.5 C1.2
NetC2_1: C2.1 U1.2 | length 274.2
  Top Layer w10: v1(1256.89,3945.87) 1298.82,3945.87 C2.1 ; v1(1263.78,4129.92) 1278.54,4115.16 1278.54,4092.76 U1.2
  Bottom Layer w10: v1(1256.89,3945.87) 1263.78,3952.76 v1(1263.78,4129.92)
NetC11_1: C11.1 U4.14 | length 167.4
  Top Layer w10: C11.1 1457.6,4826.42 1457.6,4752.6 1473.35,4736.85 U4.14
NetC12_1: C12.1 U5.14 | length 162.2
  Top Layer w10: C12.1 2046.18,4747.68 2059.96,4733.9 U5.14
NetC13_1: C13.1 U6.14 | length 183.3
  Top Layer w10: C13.1 2637.72,4855.94 2623.94,4842.16 2623.94,4741.77 2636.73,4728.98 U6.14
NetC14_1: C14.1 U4.11 | length 130.5
  Top Layer w10: U4.11 1596.38,4660.08 1607.2,4649.25 C14.1
NetC16_1: C16.1 U5.11 | length 123.2
  Top Layer w10: U5.11 2182.01,4657.13 2191.85,4647.29 C16.1
NetC17_1: C17.1 U6.11 | length 127.1
  Top Layer w10: U6.11 2721.38,4652.2 2759.76,4613.82 C17.1
NetR2_1: R2.1 U4.1 | length 77.9
  Top Layer w10: U4.1 1282.4,4835.27 R2.1
NetR3_1: R3.1 U5.1 | length 75.5
  Top Layer w10: R3.1 1870.98,4849.97 1870.98,4787.05 U5.1
NetR4_1: R4.1 U6.1 | length 93.3
  Top Layer w10: U6.1 2466.46,4780.16 2468.43,4782.13 R4.1
PWM1+: U3.12 U4.16 | length 885.7
  Top Layer w10: U4.16 1551.1,4788.03 1565.87,4802.8 v1(1565.87,4860.87)
  Bottom Layer w10: v1(1565.87,4860.87) 1582.05,4860.87 1595.47,4847.44 1595.47,4705.71 1577.76,4687.99 1419.29,4687.99 1390.75,4659.45 1390.75,4573.82 1405.51,4559.06 1604.33,4559.06 1612.01,4551.38 U3.12
PWM1-: U3.25 U4.15 | length 2011.6
  Top Layer w10: U4.15 1556.02,4762.44 1567.83,4750.63 v1(1567.83,4718.15) ; v1(1854.33,3989.17) 1879.92,3963.58 2402.56,3963.58 2412.01,3954.13 U3.25
  Bottom Layer w10: v1(1567.83,4718.15) 1554.41,4704.72 1414.37,4704.72 1371.22,4661.57 1371.22,4313.82 1379.76,4305.28 1724.28,4305.28 1825.94,4203.61 1825.94,4017.56 v1(1854.33,3989.17)
PWM2+: U3.10 U4.9 | length 505.3
  Top Layer w10: v1(1444.8,4588.23) 1495.98,4588.23 1502.87,4595.12 U4.9
  Bottom Layer w10: 1441.93,4599.41 1441.93,4610.24 1451.77,4620.08 1701.77,4620.08 U3.10
PWM2-: U3.11 U4.10 | length 328
  Top Layer w10: U4.10 1555.04,4634.49 1568.82,4620.71 v1(1568.82,4591.18)
  Bottom Layer w10: 1565.94,4602.36 1691.93,4602.36 1712.01,4582.28 U3.11
PWM3+: U3.9 U5.16 | length 508.5
  Top Layer w10: U5.16 2093.43,4830.35 v1(2117.05,4853.98)
  Bottom Layer w10: U3.9 1911.09,4510.76 1911.09,4554.79 2117.05,4760.75 v1(2117.05,4853.98)
PWM3-: U3.8 U5.15 | length 449.8
  Top Layer w10: U5.15 2142.64,4759.49 2156.42,4773.27 v1(2156.42,4801.81)
  Bottom Layer w10: U3.8 2011.09,4510.76 2011.09,4609.51 2156.42,4754.84 v1(2156.42,4801.81)
PWM4+: U3.6 U5.9 | length 376.9
  Top Layer w10: v1(2037.32,4581.34) 2084.57,4581.34 2093.43,4590.2 U5.9
  Bottom Layer w10: 2034.45,4592.52 2033.46,4593.5 2033.46,4610.24 2040.35,4617.13 2202.76,4617.13 2211.09,4608.8 2211.09,4510.76 U3.6
PWM4-: U3.7 U5.10 | length 226.2
  Top Layer w10: U5.10 2144.61,4631.53 2158.39,4617.76 v1(2158.39,4582.32)
  Bottom Layer w10: U3.7 2112.01,4581.5 2124.02,4593.5 2155.51,4593.5
PWM5+: U3.4 U6.16 | length 596.1
  Top Layer w10: U6.16 2671.18,4820.51 v1(2701.69,4851.02)
  Bottom Layer w10: U3.4 2412.01,4555.71 2488.19,4631.89 2578.74,4631.89 2697.83,4750.98 v1@2697.83,4851.02
PWM5-: U3.5 U6.15 | length 892.9
  Top Layer w10: U6.15 2718.43,4754.57 2724.33,4760.47 2724.33,4819.53 v1(2752.87,4848.07)
  Bottom Layer w10: U3.5 2312.01,4465.55 2318.9,4458.66 2433.07,4458.66 2462.6,4488.19 2462.6,4576.77 2500.98,4615.16 2584.65,4615.16 2750,4780.51 v1@2750,4848.07
PWM6+: U3.24 U6.9 | length 1137.7
  Top Layer w10: U6.9@2672.3,4599.9 2722.93,4599.9 2791.34,4531.5 v1(2791.34,4523.62)
  Bottom Layer w10: U3.24 2278.7,3944.72 2278.7,4216.67 2491.6,4429.57 2545.26,4429.57 2583.21,4467.52 2775.59,4467.52 2791.34,4483.27 v1(2791.34,4523.62)
PWM6-: U3.23 U6.10 | length 1187.9
  Top Layer w10: U6.10 2725.75,4626.61 2786.42,4565.94 2786.64,4566.17 v1(2789.51,4566.17)
  Bottom Layer w10: U3.23 2250.83,3950.24 2250.83,4230.16 2478.11,4457.44 2522.4,4457.44 2559.06,4494.09 2559.06,4546.26 2581.69,4568.9 v1@2789.51,4568.9
RX_LCD: P2.2 U3.2 | length 1022.9
  Bottom Layer w10: P2.2@2286.81,3676.18 2286.81,3722.05 2264.76,3744.09 2264.76,4222.44 2485.83,4443.5 2539.49,4443.5 U3.2@2611.09,4515.1
SCL: pad.@1412.01,4011.42 R11.1 U1.4 | length 571.1
  Top Layer w10: R11.1@1193.82,4190.94 1178.07,4190.94 1173.15,4186.02 1173.15,4133.94 1177.17,4129.92 v1(1206.69,4129.92) 1229.33,4129.92 1238.11,4121.14 U1.4
  Bottom Layer w10: v1(1206.69,4129.92) 1206.69,4161.42 1217.52,4172.24 1402.56,4172.24 1412.01,4162.8 pad.@1412.01,4011.42
SDA: pad.@1512.01,4011.42 R1.1 U1.6 | length 896.7
  Top Layer w10: U1.6 1205.79,4064.96 v1(1159.45,4064.96) 1159.21,4065.2 1159.21,4199.65 1179.06,4219.49 1223.35,4219.49 1231.22,4211.61 R1.1
  Bottom Layer w10: v1(1159.45,4064.96) 1159.45,4156.5 1192.91,4189.96 1467.52,4189.96 1512.01,4145.47 pad.@1512.01,4011.42
SW1: C10.2 S2.1 U3.13 | length 723.9
  Top Layer w10: C10.2 1110.95,4443.19 1121.06,4433.07 1231.3,4433.07 1242.32,4422.05 1242.32,4333.66 1259.05,4316.93 S2.1 1501.97,4316.93 1511.09,4326.05 1511.09,4508.92 U3.13
SW2: C9.2 S1.1 U3.14 | length 206.7
  Top Layer w10: C9.2 1296.26,4472.78 S1.1 ; C9.2@1298.03,4474.94 1384.39,4474.94 U3.14@1411.09,4501.64
TX_LCD: P2.3 U3.3 | length 999.3
  Bottom Layer w10: P2.3@2186.81,3676.18 2186.81,3718.7 2165.35,3740.16 2165.35,4166.34 2511.09,4512.07 U3.3@2511.09,4523.39
pads on no net: P2.5 U1.15 U3.15 U4.8 U5.8 U6.8

## Polygon pours and split planes (outlines as drawn)
GND on Bottom Layer "Bottom Layer-GND" (solid, pour order 70): 1001.97,5001.97 2840.55,5001.97 2840.55,3393.7 1360.24,3393.7 1351.9,3393.7 1262.67,3482.93 1001.97,4701.77
GND on Top Layer "Top Layer - GND" (solid, pour order 60): 1006.89,5000 2837.6,5000 2837.6,3393.7 2835.63,3391.73 2832.68,3394.68 1355.12,3391.73 1262.37,3483.61 1003.94,4694.88

## Silkscreen, mask and mechanical layers (free items; w line width, h text height)
Top Overlay:
  text "Teensy 3.2" at 2420.28,4388.78 h31.5
  text "SW2" at 1090.75,4375 h19.68
  text "SW1" at 1092.71,4305.12 h19.68
  text "Turing Research Lab" at 1659.45,4277.56 h39.37
  text "PHB" at 2059.06,4101.38 h19.68
  text "SCL" at 1384.84,4057.09 h19.68
  text "SDA" at 1482.28,4056.1 h19.68
  text "PHA" at 2058.07,4000 h19.68
  text "uLCD-144-G2" at 1970.47,3745.08 h31.5
  text "E2" at 1334.65,3429.13 h31.5
  text "E1" at 1436.02,3429.13 h31.5
Bottom Overlay:
  text "M2" at 1419.29,4864.17 h31.5
  text "M5" at 2370.08,4864.17 h31.5
  text "M1" at 1128.94,4863.19 h31.5
  text "M6" at 2661.42,4860.24 h31.5
  text "GALILEO HAND" at 2254.92,3479.33 h39.37
  text "-BAT+" at 2540.35,3435.04 h31.5
  text "-5V+" at 2750.98,3435.04 h31.5
  text "VER4.0  REVA1 JEVFH" at 2250.98,3418.31 h39.37
Board Outline:
  the board outline again, w7.87